# EAGLE board proiect (EAGLE 9.6.2)
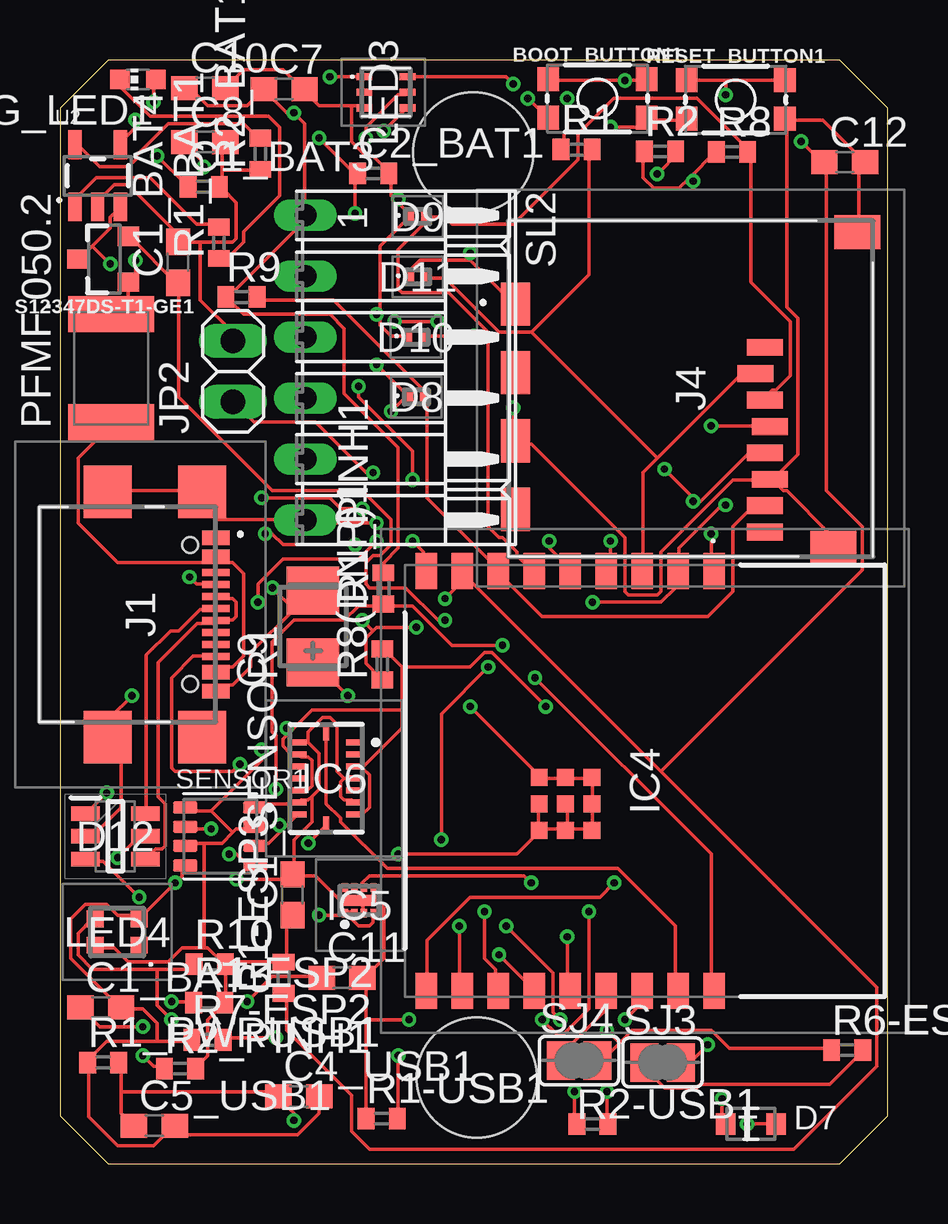
[diagram p0: board, top side]
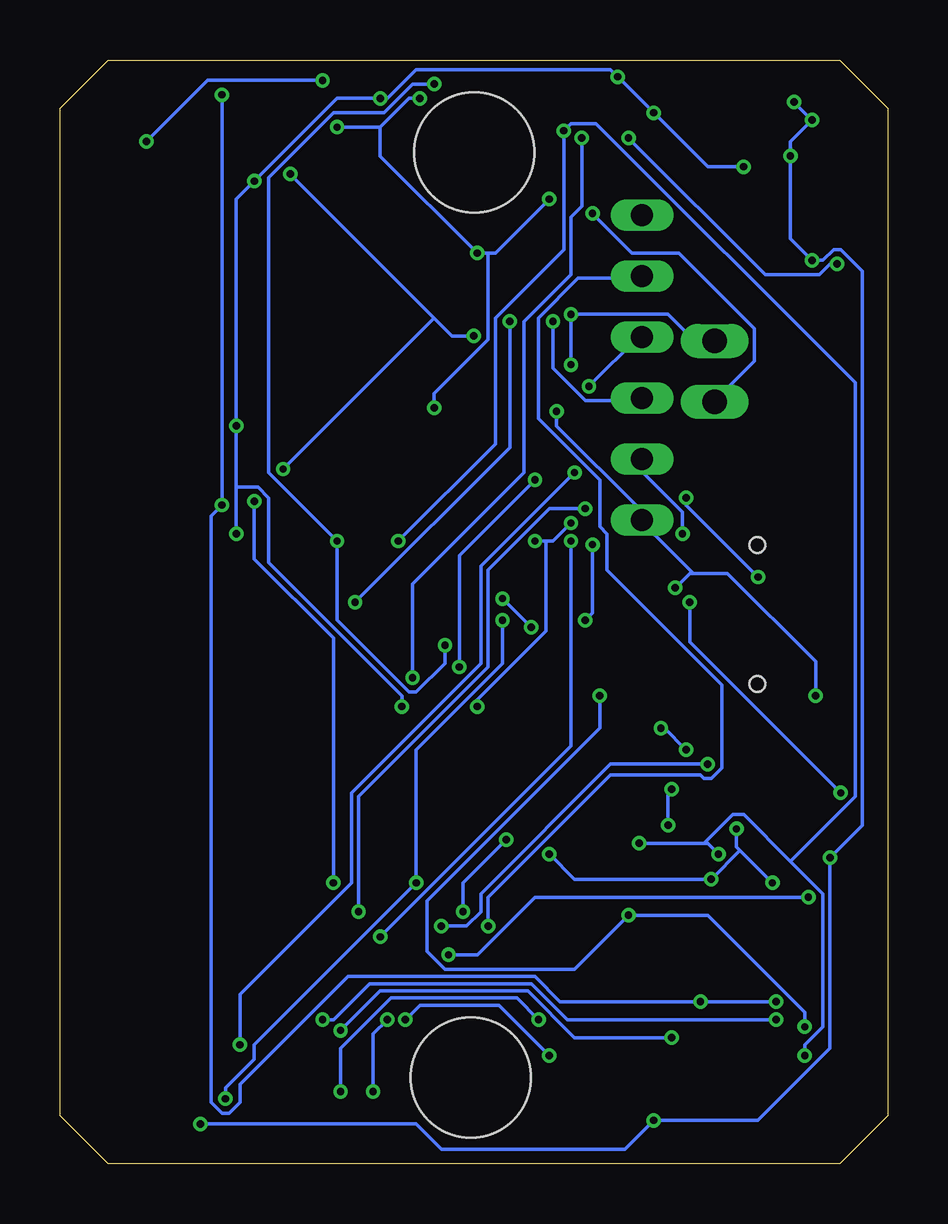
[diagram p1: board, bottom side, seen from below]

Size 34.5 x 46 mm. Coordinates in mm from the lower left corner, seen from the top.
Outline: 0,44 0,2 2,0 32.5,0 34.5,2 34.5,44 32.5,46 2,46 0,44
Copper layers (1*16): Top 0.035mm / dielectric 1.5mm / Bottom 0.035mm
Design rules "PCB-POOL Standard": minimum track width 0.15mm, minimum drill 0.3mm, track to track 0.15mm, track to pad 0.15mm, pad to pad 0.15mm, via to via 0.15mm, smd to smd 0.15mm, copper to edge 0.3mm, drill to drill 0.2mm, minimum pad ring 0.2mm, minimum via ring 0.15mm, stop-mask expansion 0.03mm, vias tented up to drill 0mil, thermal gap 0.2mm
Holes 5 mm at 17.22,42.14 17.37,3.58

## Footprints (pad centres in the part's own frame; a part is rotated, then mirrored left to right if it is on the bottom)
ESP32_WROVER_SPARKFUN-SWITCHES_TACTILE_SWITCH_SMD_4.6X2.8MM = smd 0.9 x 1: 1 -2.05,-0.8; 2 2.05,-0.8; 3 2.05,0.8; 4 -2.05,0.8
ESP32_WROVER_EAGLE-LTSPICE_C0402 = smd 0.7 x 0.9: 1 -0.65,0; 2 0.65,0
ESP32_WROVER_RCL_C0603 = smd 1.1 x 1: 1 -0.85,0; 2 0.85,0
RCL_CT3528 = smd 2 x 2.2: + -1.5,0; - 1.5,0
ESP32_WROVER_ADAFRUIT_CHIP-LED0603 = smd 0.8 x 0.8: A 0,-0.75; C 0,0.75
ESP32_WROVER_AVX---SD0805S020S1R0_AVX_SD0805S020S1R0_0 = smd 0.8 x 0.9: 1 -1.05,0; 2 1.05,0
SAMACSYS_PARTS_PESD5V0S1BL315 = smd 0.4 x 0.7: 1 -0.35,0; 2 0.35,0
SAMACSYS_PARTS_SOT95P280X145-6N = smd 1.2 x 0.6: 1 -1.25,0.95; 2 -1.25,0; 3 -1.25,-0.95; 4 1.25,-0.95; 5 1.25,0; 6 1.25,0.95
SAMACSYS_PARTS_ESP32C3WROOM02H4 = smd 1.5 x 0.9: 1 0.75,12.9; 2 0.75,11.4; 3 0.75,9.9; 4 0.75,8.4; 5 0.75,6.9; 6 0.75,5.4; 7 0.75,3.9; 8 0.75,2.4; 9 0.75,0.9; 10 18.25,0.9; 11 18.25,2.4; 12 18.25,3.9; 13 18.25,5.4; 14 18.25,6.9; 15 18.25,8.4; 16 18.25,9.9; 17 18.25,11.4; 18 18.25,12.9 | smd 0.7 x 0.7: 19 10.46,6.7; 20 11.56,6.7; 21 11.56,7.8; 22 10.46,7.8; 23 9.36,7.8; 24 9.36,6.7; 25 9.36,5.6; 26 10.46,5.6; 27 11.56,5.6
SAMACSYS_PARTS_NCP186AMX330TAG = smd 0.26 x 0.35: 1 -0.6,-0.275; 2 -0.2,-0.275; 3 0.2,-0.275; 4 0.6,-0.275; 5 0.6,0.775; 6 0.2,0.775; 7 -0.2,0.775; 8 -0.6,0.775 | smd 1.44 x 0.44: 9 0,0.25
SAMACSYS_PARTS_BMI085 = smd 0.675 x 0.25: 1 1.165,1.5; 2 1.165,1; 3 1.165,0.5; 4 1.165,0; 5 1.165,-0.5; 6 1.165,-1; 7 1.165,-1.5; 9 -1.165,-1.5; 10 -1.165,-1; 11 -1.165,-0.5; 12 -1.165,0; 13 -1.165,0.5; 14 -1.165,1; 15 -1.165,1.5 | smd 0.25 x 0.675: 8 0,-1.915; 16 0,1.915
SAMACSYS_PARTS_USB4110GFA = smd 0.3 x 1.15: A1 -3.35,3.678; A4 -2.55,3.678; A5 -1.25,3.678; A6 -0.25,3.678; A7 0.25,3.678; A8 1.25,3.678; A9 2.55,3.678; A12 3.35,3.678; B1 3.05,3.678; B4 2.25,3.678; B5 1.75,3.678; B6 0.75,3.678; B7 -0.75,3.678; B8 -1.75,3.678; B9 -2.25,3.678; B12 -3.05,3.678 | smd 2.18 x 2: MP1 -5.11,-0.827; MP2 5.11,-0.827; MP3 -5.11,3.103; MP4 5.11,3.103 | hole 0.65: -2.89,2.603; 2.89,2.603
SAMACSYS_PARTS_112ATAARR03ATTEND = smd 1.8 x 1.2: G1 10.6,10.4; G2 4.9,10.4; S1 7.75,10.4; S2 2.05,10.4 | smd 1.4 x 1.9: G3 13.6,-3.85; G4 0.45,-2.85 | smd 0.7 x 1.5: P1 8.8,0; P2 7.7,0.4; P3 6.6,0; P4 5.5,-0.2; P5 4.4,0; P6 3.3,-0.2; P7 2.2,0; P8 1.1,0
PINHEAD_1X02 = drill 1.016 long: 1 -1.27,0; 2 1.27,0
ESP32_WROVER_SAMACSYS_PARTS_LTR303ALS01 = smd 0.3 x 0.65: 1 -0.65,-0.9; 2 0,-0.9; 3 0.65,-0.9; 4 0.65,0.9; 5 0,0.9; 6 -0.65,0.9
SAMACSYS_PARTS_WS2812B2020 = smd 0.7 x 0.7: 1 0.915,-0.55; 2 0.915,0.55; 3 -0.915,0.55; 4 -0.915,-0.55
ESP32_WROVER_VARISTOR_CT/CN1812 = smd 1.5 x 3.6: 1 -2.25,0; 2 2.25,0
ESP32_WROVER_EAGLE-LTSPICE_R0402 = smd 0.7 x 0.9: 1 -0.65,0; 2 0.65,0
ESP32_WROVER_SPARKFUN-DISCRETESEMI_SOT23-3 = smd 0.8 x 0.9: 1 -0.95,-1; 2 0.95,-1; 3 0,1.1
ESP32_WROVER_BME680_PSON80P300X300X100-8N = smd 1.016 x 0.5: 1 1.458,1.2; 2 1.458,0.4; 3 1.458,-0.4; 4 1.458,-1.2; 5 -1.458,-1.22; 6 -1.458,-0.4; 7 -1.458,0.4; 8 -1.458,1.2
JUMPER_SJ = smd 1.168 x 1.6: 1 -0.762,0; 2 0.762,0
06PA = drill 0.914 long: 1 -6.35,0; 2 -3.81,0; 3 -1.27,0; 4 1.27,0; 5 3.81,0; 6 6.35,0
ESP32_WROVER_SPARKFUN-IC-POWER_SOT23-5 = smd 0.55 x 1.2: 1 -0.95,-1.3; 2 0,-1.3; 3 0.95,-1.3; 4 0.95,1.3; 5 -0.95,1.3

## Placement (x,y rotation side)
BOOT_BUTTON1  [ESP32_WROVER_SPARKFUN-SWITCHES_TACTILE_SWITCH_SMD_4.6X2.8MM]  22.4,44.4 0 top
C1_BAT3  4.7uF  [ESP32_WROVER_EAGLE-LTSPICE_C0402]  5.99,40.72 0 top
C1_BAT4  4.7uF  [ESP32_WROVER_RCL_C0603]  4.93,37.57 90 top
C1_BAT5  4.7uF  [ESP32_WROVER_RCL_C0603]  1.7,6.5 0 top
C1_SENSOR1  100nF  [ESP32_WROVER_RCL_C0603]  9.7,11.2 90 top
C2_BAT1  4.7uF  [ESP32_WROVER_EAGLE-LTSPICE_C0402]  13.06,41.27 0 top
C4_USB1  100nF  [ESP32_WROVER_RCL_C0603]  9.96,2.79 0 top
C5_USB1  4.7uF  [ESP32_WROVER_RCL_C0603]  3.94,1.57 0 top
C7  100nF  [ESP32_WROVER_RCL_C0603]  9.35,44.78 0 top
C8  100nF  [ESP32_WROVER_RCL_C0603]  6.05,42.57 0 top
C9  100uF TANT  [RCL_CT3528]  10.54,22.38 90 top
C10  100nF  [ESP32_WROVER_RCL_C0603]  6.05,44.83 0 top
C11  1uF  [ESP32_WROVER_RCL_C0603]  11.76,7.75 0 top
C12  100nF  [ESP32_WROVER_RCL_C0603]  32.72,41.73 0 top
CHG_LED1  [ESP32_WROVER_ADAFRUIT_CHIP-LED0603]  3.25,45.19 90 top
D7  ESP32_WROVER_AVX---SD0805S020S1R0_AVX_SD0805S020S1R0AVX_SD0805S020S1R0_0_0  [ESP32_WROVER_AVX---SD0805S020S1R0_AVX_SD0805S020S1R0_0]  28.8,1.65 0 top
D8  PESD3V3S1BLYL  [SAMACSYS_PARTS_PESD5V0S1BL315]  14.86,31.95 0 top
D9  PESD3V3S1BLYL  [SAMACSYS_PARTS_PESD5V0S1BL315]  14.91,39.47 0 top
D10  PESD3V3S1BLYL  [SAMACSYS_PARTS_PESD5V0S1BL315]  14.83,34.44 0 top
D11  PESD3V3S1BLYL  [SAMACSYS_PARTS_PESD5V0S1BL315]  14.91,36.96 0 top
D12  USBLC6-2SC6Y  [SAMACSYS_PARTS_SOT95P280X145-6N]  2.31,13.64 0 top
IC4  ESP32-C3-WROOM-02-H4  [SAMACSYS_PARTS_ESP32C3WROOM02H4]  14.38,25.45 270 top
IC5  NCP186BMX330TAG  [SAMACSYS_PARTS_NCP186AMX330TAG]  12.47,10.72 0 top
IC6  BMI085  [SAMACSYS_PARTS_BMI085]  11.1,16.05 0 top
J1  USB4110-GF-A  [SAMACSYS_PARTS_USB4110GFA]  2.82,22.89 270 top
J4  112A-TAAR-R03_ATTEND  [SAMACSYS_PARTS_112ATAARR03ATTEND]  29.39,25.22 90 top
JP2  [PINHEAD_1X02]  7.21,33.02 90 top
LED3  LTR308  [ESP32_WROVER_SAMACSYS_PARTS_LTR303ALS01]  13.59,44.65 270 top
LED4  WS2812B-2020  [SAMACSYS_PARTS_WS2812B2020]  2.39,9.65 0 top
PFMF.050.2  500mA  [ESP32_WROVER_VARISTOR_CT/CN1812]  2.13,33.15 90 top
R1  10K  [ESP32_WROVER_EAGLE-LTSPICE_R0402]  21.54,42.27 0 top
R1-ESP2  10K  [ESP32_WROVER_EAGLE-LTSPICE_R0402]  6.22,6.71 0 top
R1-ESP3  10K  [ESP32_WROVER_EAGLE-LTSPICE_R0402]  9.32,7.75 90 top
R1-USB1  5K1  [ESP32_WROVER_EAGLE-LTSPICE_R0402]  13.41,1.88 0 top
R1_BAT1  200  [ESP32_WROVER_EAGLE-LTSPICE_R0402]  6.63,38.38 90 top
R1_PINH1  10k  [ESP32_WROVER_EAGLE-LTSPICE_R0402]  13.49,23.98 90 top
R1_PWRUSB1  100K  [ESP32_WROVER_EAGLE-LTSPICE_R0402]  1.8,4.22 0 top
R2  10K  [ESP32_WROVER_EAGLE-LTSPICE_R0402]  25.02,42.19 0 top
R2-USB1  5K1  [ESP32_WROVER_EAGLE-LTSPICE_R0402]  22.2,1.65 0 top
R2_BAT1  2K  [ESP32_WROVER_EAGLE-LTSPICE_R0402]  8.36,42.09 90 top
R2_PINH1  10K  [ESP32_WROVER_EAGLE-LTSPICE_R0402]  5,3.96 0 top
R6-ESP2  100K  [ESP32_WROVER_EAGLE-LTSPICE_R0402]  32.82,4.72 0 top
R7-ESP2  100K  [ESP32_WROVER_EAGLE-LTSPICE_R0402]  6.15,5.16 0 top
R8  10K  [ESP32_WROVER_EAGLE-LTSPICE_R0402]  28.02,42.16 0 top
R8(DNP)1  10K  [ESP32_WROVER_EAGLE-LTSPICE_R0402]  13.44,20.8 90 top
R9  10K  [ESP32_WROVER_EAGLE-LTSPICE_R0402]  7.57,36.12 0 top
R10  10K  [ESP32_WROVER_EAGLE-LTSPICE_R0402]  6.25,8.31 0 top
RESET_BUTTON1  [ESP32_WROVER_SPARKFUN-SWITCHES_TACTILE_SWITCH_SMD_4.6X2.8MM]  28.17,44.35 0 top
S12347DS-T1-GE1  20V/4.2A/52mΩ/1.4W  [ESP32_WROVER_SPARKFUN-DISCRETESEMI_SOT23-3]  1.85,37.69 90 top
SENSOR1  BME680  [ESP32_WROVER_BME680_PSON80P300X300X100-8N]  6.68,13.64 0 top
SJ3  [JUMPER_SJ]  25.12,4.22 0 top
SJ4  [JUMPER_SJ]  21.64,4.29 0 top
SL2  [06PA]  10.24,33.17 270 top
U2  MCP73831  [ESP32_WROVER_SPARKFUN-IC-POWER_SOT23-5]  1.57,41.17 0 top

## Library data of the parts
BOOT_BUTTON1 RESET_BUTTON1 = ESP32_C3_Sparrow; PROD_ID: SWCH-14139; SF_SKU: COM-08720
C1_BAT3 C2_BAT1 = ESP32_C3_Sparrow; SPICEMODEL: NONE; SPICEPREFIX: C
C1_BAT4 C1_BAT5 C1_SENSOR1 C4_USB1 C5_USB1 C7-C12 = ESP32_C3_Sparrow; SPICEPREFIX: C
CHG_LED1 JP2 PFMF.050.2 SJ3 SJ4 = ESP32_C3_Sparrow
D7 = ESP32_C3_Sparrow; CENTROID_NOT_SPECIFIED: No; DATASHEET: http://datasheets.avx.com/schottky.pdf; DIGIKEY_DESCRIPTION: DIODE SCHOTTKY 20V 1A 0805; DIGIKEY_PART_NUMBER: 478-7800-1-ND; LEAD_FREE: yes; MF: AVX; MOUSER_PART_NUMBER: 581-SD0805S020S1R0; MPN: SD0805S020S1R0; PACKAGE: 0805 (2012 metric); PREFIX: D; ROHS: yes; TEMPERATURE_RANGE_HIGH: +125°C; TEMPERATURE_RANGE_LOW: -55°C
D8-D11 = ESP32_C3_Sparrow; ARROW_PART_NUMBER: PESD3V3S1BLYL; ARROW_PRICE-STOCK: https://www.arrow.com/en/products/pesd3v3s1blyl/nexperia?region=nac; DESCRIPTION: PESD3V3S1BL - Low capacitance bidirectional ESD protection diode; HEIGHT: 0mm; MANUFACTURER_NAME: Nexperia; MANUFACTURER_PART_NUMBER: PESD3V3S1BLYL; MOUSER_PART_NUMBER: 771-PESD3V3S1BLYL; MOUSER_PRICE-STOCK: https://www.mouser.co.uk/ProductDetail/Nexperia/PESD3V3S1BLYL?qs=vLWxofP3U2zWoKHYJMVoKQ%3D%3D
D12 = ESP32_C3_Sparrow; ARROW_PART_NUMBER: USBLC6-2SC6Y; ARROW_PRICE-STOCK: https://www.arrow.com/en/products/usblc6-2sc6y/stmicroelectronics?region=nac; DESCRIPTION: Low Cap. ESD Protection Auto SOT-23-6 STMicroelectronics USBLC6-2SC6Y, Dual Uni-Directional TVS Diode Array, 6-Pin SOT-23; HEIGHT: 1.45mm; MANUFACTURER_NAME: STMicroelectronics; MANUFACTURER_PART_NUMBER: USBLC6-2SC6Y; MOUSER_PART_NUMBER: 511-USBLC6-2SC6Y; MOUSER_PRICE-STOCK: https://www.mouser.co.uk/ProductDetail/STMicroelectronics/USBLC6-2SC6Y?qs=gNDSiZmRJS%2FOgDexvXkdow%3D%3D
IC4 = ESP32_C3_Sparrow; DESCRIPTION: WiFi Modules (802.11) SMD module, ESP32-C3, 4MB SPI flash, PCB antenna, -40 C +105 C; HEIGHT: 3.35mm; MANUFACTURER_NAME: Espressif Systems; MANUFACTURER_PART_NUMBER: ESP32-C3-WROOM-02-H4; MOUSER_PART_NUMBER: 356-ESP32C3WROOM02H4; MOUSER_PRICE-STOCK: https://www.mouser.co.uk/ProductDetail/Espressif-Systems/ESP32-C3-WROOM-02-H4?qs=stqOd1AaK79%2FSA14oWtR%252Bw%3D%3D
IC5 = ESP32_C3_Sparrow; ARROW_PART_NUMBER: NCP186BMX330TAG; ARROW_PRICE-STOCK: https://www.arrow.com/en/products/ncp186bmx330tag/on-semiconductor?region=nac; DESCRIPTION: LDO Voltage Regulators FAST TRANSIENT RESPO; HEIGHT: mm; MANUFACTURER_NAME: onsemi; MANUFACTURER_PART_NUMBER: NCP186BMX330TAG; MOUSER_PART_NUMBER: 863-NCP186BMX330TAG; MOUSER_PRICE-STOCK: https://www.mouser.co.uk/ProductDetail/onsemi/NCP186BMX330TAG?qs=tCMd4XlZ%2FiDuLBXmI4EY0w%3D%3D
IC6 = ESP32_C3_Sparrow; ARROW_PART_NUMBER: BMI085; ARROW_PRICE-STOCK: https://www.arrow.com/en/products/bmi085/bosch; DESCRIPTION: IMUs - Inertial Measurement Units High-performance IMU BMI085 for virtual and augmented reality applications; HEIGHT: 1mm; MANUFACTURER_NAME: BOSCH; MANUFACTURER_PART_NUMBER: BMI085; MOUSER_PART_NUMBER: 262-BMI085; MOUSER_PRICE-STOCK: https://www.mouser.co.uk/ProductDetail/Bosch-Sensortec/BMI085?qs=y6ZabgHbY%252ByGCM8LfWZyqA%3D%3D
J1 = ESP32_C3_Sparrow; DESCRIPTION: CONN USB 2.0 TYPE-C R/A SMT; HEIGHT: 3.26mm; MANUFACTURER_NAME: GCT (GLOBAL CONNECTOR TECHNOLOGY); MANUFACTURER_PART_NUMBER: USB4110-GF-A; MOUSER_PART_NUMBER: 640-USB4110-GF-A; MOUSER_PRICE-STOCK: https://www.mouser.co.uk/ProductDetail/GCT/USB4110-GF-A?qs=KUoIvG%2F9IlYiZvIXQjyJeA%3D%3D
J4 = ESP32_C3_Sparrow; DESCRIPTION: Micro SD Card Socket, Push-Push Type, Top Mount, SMT, H=1.83mm, 10u; HEIGHT: 1.9mm; MANUFACTURER_NAME: ATTEND; MANUFACTURER_PART_NUMBER: 112A-TAAR-R03 ATTEND
LED3 = ESP32_C3_Sparrow; ARROW_PART_NUMBER: LTR-303ALS-01; ARROW_PRICE-STOCK: https://www.arrow.com/en/products/ltr-303als-01/lite-on-technology?region=nac; DESCRIPTION: Ambient Light Sensors Ambient Light Photo Sensor; HEIGHT: 0mm; MANUFACTURER_NAME: Lite-On; MANUFACTURER_PART_NUMBER: LTR-303ALS-01; MOUSER_PART_NUMBER: 859-LTR-303ALS-01; MOUSER_PRICE-STOCK: https://www.mouser.co.uk/ProductDetail/Lite-On/LTR-303ALS-01?qs=Ml%2FaxAEbwm%252Bm%252BetMkBDC8g%3D%3D
LED4 = ESP32_C3_Sparrow; DESCRIPTION: LED; SMD; 2020; RGB; 2x2x0.84mm; 3.75.3V; Lens: transparent; 2kHz; HEIGHT: 0.84mm; MANUFACTURER_NAME: Worldsemi; MANUFACTURER_PART_NUMBER: WS2812B-2020
R1 R1-ESP2 R1-ESP3 R1-USB1 R1_BAT1 R1_PINH1 R1_PWRUSB1 R2 R2-USB1 R2_BAT1 R2_PINH1 R6-ESP2 R7-ESP2 R8 R8(DNP)1 R9 R10 = ESP32_C3_Sparrow; SPICEMODEL: NONE; SPICEPREFIX: R
S12347DS-T1-GE1 = ESP32_C3_Sparrow; PROD_ID: TRAN-14388
SENSOR1 = ESP32_C3_Sparrow; AVAILABILITY: Unavailable; DESCRIPTION: Integrated Environmental Unit; MF: Bosch Sensortec; MP: BME680; PACKAGE: LGA-8 Bosch Tools; PRICE: None
SL2 = con-amp-quick; OC_FARNELL: unknown; OC_NEWARK: unknown
U2 = ESP32_C3_Sparrow; PROD_ID: IC-09995

## Nets
3V1: C1_SENSOR1.1 C7.1 C8.1 C10.1 IC4.1 IC6.3 IC6.7 IC6.11 IC6.14 J4.P4 LED3.1 LED4.4 R1-ESP2.2 R1-ESP3.2 R1.1 R1_PINH1.2 R2.1 R2_PINH1.2 R8(DNP)1.2 R8.1 R9.1 R10.2 SENSOR1.2 SENSOR1.6 SENSOR1.8 SL2.1
A2: IC4.15 SJ4.1
BOOT1: BOOT_BUTTON1.3 BOOT_BUTTON1.4 C12.1 IC4.8 R1-ESP3.1 R8(DNP)1.1 SL2.5
D+1: D12.1 IC4.14
D-1: D12.3 IC4.13
DN1: D12.4 J1.A7 J1.B7
DP1: D12.6 J1.A6 J1.B6
GND1: BOOT_BUTTON1.1 BOOT_BUTTON1.2 C1_BAT3.2 C1_BAT4.2 C1_BAT5.2 C1_SENSOR1.2 C2_BAT1.2 C4_USB1.2 C5_USB1.2 C7.2 C8.2 C9.- C10.2 C11.2 C12.2 D8.1 D9.1 D10.1 D11.1 D12.2 IC4.9 IC4.19 IC4.20 IC4.21 IC4.22 IC4.23 IC4.24 IC4.25 IC4.26 IC4.27 IC5.3 IC5.5 IC5.9 IC6.4 IC6.6 IC6.10 IC6.15 J1.A1 J1.A12 J1.B1 J1.B12 J1.MP1 J1.MP2 J1.MP3 J1.MP4 J4.G1 J4.G2 J4.G3 J4.G4 J4.P6 JP2.2 LED3.3 LED4.2 R1-USB1.1 R1_PWRUSB1.1 R2-USB1.2 R2_BAT1.1 R7-ESP2.1 RESET_BUTTON1.1 RESET_BUTTON1.2 SENSOR1.1 SENSOR1.5 SENSOR1.7 SL2.6 U2.2
GPIO2: IC4.18 LED3.5
GPIO3: IC4.17 IC6.16
MISO1: D8.2 IC4.7 J4.P7 R9.2
MOSI1: D9.2 IC4.6 J4.P3 R8.2
N$9: J1.A5 R1-USB1.2
N$11: J1.B5 R2-USB1.1
N$12: C1_BAT4.1 D7.1 IC5.6 IC5.7 IC5.8 S12347DS-T1-GE1.2
N$13: C1_BAT5.1 C9.+ IC5.1 IC5.2 IC5.4
N$14: R6-ESP2.2 SJ3.1
N$15: R6-ESP2.1 R7-ESP2.2 SJ4.2
N$16: R1_BAT1.2 U2.1
N$17: CHG_LED1.C R1_BAT1.1
N$18: R2_BAT1.2 U2.5
NEOPIXEL1: IC4.16 LED4.3 R10.1
RESET1: C11.1 IC4.2 R1-ESP2.1 RESET_BUTTON1.3 RESET_BUTTON1.4 SL2.4
RX1: IC4.11 SL2.2
SCK1: D10.2 IC4.10 J4.P5 R2.2
SCL1: IC4.5 IC6.8 LED3.4 R2_PINH1.1 SENSOR1.4
SDA1: IC4.4 IC6.9 LED3.6 R1_PINH1.1 SENSOR1.3
SS1: D11.2 IC4.3 J4.P2 R1.2
TX1: IC4.12 SL2.3
VBAT1: C2_BAT1.1 JP2.1 S12347DS-T1-GE1.3 SJ3.2 U2.3
VBUS1: C1_BAT3.1 C4_USB1.1 C5_USB1.1 CHG_LED1.A D7.2 D12.5 PFMF.050.2.2 R1_PWRUSB1.2 S12347DS-T1-GE1.1 U2.4
VUSB1: J1.A4 J1.A9 J1.B4 J1.B9 PFMF.050.2.1

## Tracks (layer width: path | path; a pad name or v marks a point on that pad's centre or on a via)
3V1  (via drill 0.3)
  Top 0.15: R1_PINH1.2 13.5,24.75 13.5,25.05 14.1,25.65 14.1,29.85 11.85,32.1 11.85,34.8 11.25,35.4 7.65,35.4 7.05,36 R9.1 7.05,36.15 10.35,39.45 SL2.1 10.2,39.6 10.2,43.35 v9.75,43.8 9.45,43.8 8.55,44.7 C7.1 8.4,44.7 7.8,44.1 6.15,44.1 5.55,44.7 5.25,44.7 C10.1 | 6,13.35 6.75,13.35 7.2,13.8 | 6,13.35 5.25,13.35 SENSOR1.6 | 7.2,13.8 7.35,13.95 8.1,13.95 SENSOR1.2 | 6.3,14.7 5.25,14.7 SENSOR1.8 | 7.2,13.8 6.3,14.7 | R2_PINH1.2 5.7,4.05 6.15,4.5 6.15,6 6.75,6.6 R1-ESP2.2 6.9,6.75 6.9,8.25 R10.2 | C1_SENSOR1.1 9.6,10.35 9.45,10.2 9.45,8.4 R1-ESP3.2 9.3,8.4 6.9,8.4 R10.2 | 6,9 6.15,9 6.75,8.4 R10.2 | 6,9 5.1,9 4.5,8.4 2.85,8.4 2.25,9 1.5,9 LED4.4 | 6,9 6,13.35 | IC6.11 10.05,15.6 10.35,15.6 10.5,15.75 10.5,16.8 10.35,16.95 10.05,16.95 IC6.14 9.9,17.1 9.6,17.1 9.3,17.4 9.3,17.7 9.6,18 | 12.6,16.5 12.9,16.2 12.9,14.85 12.6,14.55 12.3,14.55 IC6.7 | 12.6,16.5 12.3,16.5 IC6.3 12.6,16.5 | 14.25,20.7 13.5,21.45 R8(DNP)1.2 | 14.25,18.9 14.25,18.15 12.6,16.5 | 14.25,18.9 14.25,20.7 | 9.6,18 10.5,18.9 14.25,18.9 | 26.25,41.1 27.3,42.15 R8.1 | 26.25,41.1 25.8,40.65 24.75,40.65 24.3,41.1 24.3,42.15 R2.1 | v11.25,45.3 12.6,45.3 LED3.1 | v21.15,44.4 21.15,43.05 21,42.9 21,42.3 R1.1 | v6,41.55 6,41.7 5.25,42.45 C8.1 | v27.15,26.25 27.15,24.75 IC4.1 | v27.15,30.75 29.55,30.75 J4.P4 | v26.4,40.95 26.25,41.1 | 14.25,20.7 17.1,20.7 17.7,21.3 18,21.3 v20.25,19.05 | 6.3,14.7 8.4,16.8 v8.4,17.25 | 9.6,18 v9.45,18.15
  Bottom 0.15: v6,41.55 7.5,41.55 v9.75,43.8 v11.25,45.3 11.55,45.6 19.65,45.6 20.85,44.4 v21.15,44.4 22.95,44.4 v26.4,40.95 27.15,40.2 v27.15,30.75 27.15,28.2 | 27.15,28.2 v27.15,26.25 | v20.25,19.05 20.25,19.5 25.8,25.05 25.8,27.75 26.25,28.2 27.15,28.2 | v8.4,17.25 9.3,18.15 v9.45,18.15
A2
  Top 0.15: IC4.15 22.65,7.2 22.65,6.3 21,4.65 21,4.35 SJ4.1
BOOT1  (via drill 0.3)
  Top 0.15: BOOT_BUTTON1.4 20.4,45.15 v23.55,45.15 24.45,45.15 BOOT_BUTTON1.3 | 16.95,24.45 16.8,24.6 IC4.8 16.95,24.45 | 16.95,24.45 25.05,16.35 | 25.05,16.35 34.05,7.35 34.05,4.05 30.6,0.6 12.9,0.6 12.15,1.35 12.15,2.85 9.45,5.55 9.45,7.05 R1-ESP3.1 | 13.05,22.2 13.2,22.35 v14.85,22.35 | 13.05,22.2 12.75,21.9 12.75,20.85 13.35,20.25 R8(DNP)1.1 | 16.95,24.45 v16.05,23.55 | 25.05,16.35 33.45,24.75 33.45,26.55 31.95,28.05 31.95,41.7 C12.1 31.8,41.7 v30.9,42.6 | v8.55,26.25 8.85,26.25 9.3,25.8 v12.3,25.8 | 13.05,22.2 v12.6,22.65
  Bottom 0.15: v16.05,23.55 v14.85,22.35 | v23.55,45.15 28.35,45.15 v30.9,42.6 | v8.55,26.25 8.55,27.15 10.2,28.8 10.2,29.25 SL2.5 | v12.3,25.8 12.3,22.95 v12.6,22.65
D+1  (via drill 0.3)
  Top 0.15: v1.95,15.45 1.2,14.7 D12.1 | v8.25,23.4 8.25,24.15 9.3,25.2 12.45,25.2 v13.2,25.95 | v21.15,9.45 21.15,7.35 IC4.14
  Bottom 0.15: v1.95,15.45 8.25,21.75 v8.25,23.4 | v13.2,25.95 13.2,17.4 v21.15,9.45
D-1  (via drill 0.3)
  Top 0.15: v3.3,11.1 1.8,12.6 1.2,12.6 D12.3 | v18.3,8.7 19.65,7.35 IC4.13
  Bottom 0.15: v3.3,11.1 14.7,11.1 17.1,8.7 v18.3,8.7
DN1
  Top 0.15: J1.A7 6.6,22.65 7.2,22.65 7.35,22.8 7.35,23.4 7.2,23.55 6.6,23.55 J1.B7
  Top 0.152: D12.4 3.98,13.11 4.25,13.11 4.39,13.25 4.39,14.98 4.09,15.28 4.09,20.89 5.71,22.51 6.37,22.51 J1.A7
DP1
  Top 0.15: 6.99,22.12 6.51,22.12 J1.B6 | J1.A6 6.45,23.1 5.85,23.1 4.95,22.2 4.61,22.2 3.6,21.2 3.6,14.7 D12.6
GND1  (via drill 0.3)
  Top 0.15: SENSOR1.5 5.1,12.3 5.1,12 v4.8,11.7 3.45,10.35 LED4.2 3.3,10.35 2.4,10.35 1.95,10.8 1.05,10.8 0.45,10.2 0.45,8.55 2.55,6.45 C1_BAT5.2 2.7,6.45 3.45,6.45 4.05,5.85 4.05,5.1 | v6.3,13.95 5.25,13.95 SENSOR1.7 | 4.05,5.1 5.4,5.1 R7-ESP2.1 | 4.05,5.1 1.95,5.1 1.2,4.35 R1_PWRUSB1.1 1.2,4.2 1.2,1.95 2.4,0.75 3.9,0.75 4.65,1.5 C5_USB1.2 4.8,1.5 5.1,1.2 9.9,1.2 10.8,2.1 10.8,2.7 C4_USB1.2 | 13.05,11.1 13.05,11.4 IC5.5 | 13.05,11.1 12.9,10.95 12.6,10.95 IC5.9 | C1_SENSOR1.2 9.75,12 10.65,12 11.7,10.95 12.45,10.95 IC5.9 | 11.85,16.05 11.7,15.9 11.7,15.3 11.85,15.15 12.15,15.15 IC6.6 | 11.85,16.05 12.15,16.05 IC6.4 | SENSOR1.1 8.25,14.85 8.4,15 9.9,15 IC6.10 10.05,15.15 10.35,15.15 10.5,15.3 | 10.35,17.55 10.05,17.55 IC6.15 | 10.35,17.55 10.8,17.1 10.8,15.6 10.5,15.3 | 11.85,16.05 11.55,16.35 11.55,18.3 11.25,18.6 10.95,18.6 10.35,18 10.35,17.55 | 10.5,15.3 10.5,14.25 9.75,13.5 9.75,12.15 C1_SENSOR1.2 | 12.75,6 12.75,7.65 C11.2 12.75,7.8 13.5,8.55 13.5,10.65 13.05,11.1 | 12.75,6 12.75,1.95 R1-USB1.1 | v22.8,3 22.8,1.8 R2-USB1.2 | 12.75,6 v14.55,6 | 13.05,11.1 12.55,10.99 IC5.9 | v7.35,11.85 9.45,11.85 9.6,12 C1_SENSOR1.2 | J1.MP4 6,17.85 6.45,18.3 6.45,19.5 J1.A12 6.6,19.65 6.6,19.8 J1.B1 6.6,19.95 7.2,19.95 7.95,20.7 7.95,21.3 9.75,23.1 | 9.75,23.1 10.5,23.85 C9.- 9.75,23.1 | J1.B12 6.6,25.95 6.6,26.1 J1.A1 6.45,26.25 6.45,26.85 | 6.45,26.85 6.45,27.45 6,27.9 J1.MP3 5.85,28.05 2.1,28.05 J1.MP1 | D12.2 1.2,13.65 1.5,13.95 1.65,13.95 2.55,14.85 2.55,17.25 2.1,17.7 J1.MP2 2.1,17.85 2.1,18.6 v3,19.5 | IC4.27 19.95,13.95 19.95,14.85 IC4.26 | 21.15,13.95 21.15,14.85 IC4.19
  Top 0.15: IC4.27 20.1,13.95 21,13.95 IC4.20 21.15,13.95 | 21.15,13.95 22.05,13.95 IC4.21 22.2,13.95 22.2,14.85 IC4.22 22.2,15 22.2,16.05 IC4.23 22.05,16.05 21.15,16.05 IC4.24 21,16.05 20.1,16.05 IC4.25 19.95,16.2 v17.1,19.05 | v13.8,31.35 14.4,31.95 D8.1 14.4,32.1 v13.2,33.3 | v14.7,25.95 15.15,25.5 15.15,24.75 IC4.9 | v13.2,26.7 10.35,26.7 SL2.6 10.2,26.85 6.45,26.85 | v8.85,24 9.75,23.1 | v14.1,12.9 19.05,12.9 19.95,13.8 IC4.27 | 30.3,43.5 31.8,43.5 33.45,41.85 C12.2 33.45,41.7 33.3,41.55 33.3,38.85 J4.G3 | 29.7,28.5 30.15,28.05 30.3,28.05 32.1,26.25 32.1,25.8 J4.G4 | 30.3,43.5 30.3,35.7 30.75,35.25 30.75,29.55 29.7,28.5 | 30.3,43.5 RESET_BUTTON1.2 | 29.7,28.5 J4.P6 29.55,28.5 28.05,28.5 25.05,25.5 25.05,23.85 24.9,23.7 23.7,23.7 23.55,23.85 23.55,26.1 19.65,30 19.05,30 J4.G2 18.9,30.15 v18.9,31.5 | 17.1,37.65 15,37.65 14.7,37.35 14.7,37.05 D11.1 | 17.1,37.65 18.9,35.85 J4.G1 | v19.5,44.4 20.25,43.65 BOOT_BUTTON1.1 | v22.95,43.2 24.15,43.2 24.45,43.5 BOOT_BUTTON1.2 24.6,43.5 26.1,43.5 RESET_BUTTON1.1 | v17.1,37.95 17.1,37.65 | 6.75,41.4 6.75,42.45 C8.2 | 6.75,41.4 6.75,40.8 C1_BAT3.2 6.75,40.65 7.35,40.05 7.35,38.55 7.2,38.4 5.85,38.4 | 6.75,41.4 8.25,41.4 R2_BAT1.1 | 5.85,38.4 4.95,38.4 C1_BAT4.2 4.8,38.55 4.8,38.85 2.85,40.8 2.25,40.8 1.65,40.2 1.65,39.9 U2.2 | 5.85,38.4 5.85,36 7.2,34.65 7.2,34.35 JP2.2 | 12.15,44.1 10.8,44.1 10.2,44.7 C7.2 10.05,44.85 9.3,45.6 7.65,45.6 6.9,44.85 C10.2 | 12.15,44.1 12.6,44.1 LED3.3 | 13.35,35.4 13.35,38.25 14.55,39.45 D9.1 14.55,39.6 13.95,40.2 | 13.35,35.4 13.35,34.95 13.8,34.5 14.4,34.5 D10.1 | 13.95,40.2 13.8,40.35 13.8,41.25 C2_BAT1.2 13.65,41.4 13.05,42 12.75,42 12.15,42.6 12.15,44.1
  Top 0.15: 13.35,35.4 v13.2,35.4 | 13.95,40.2 v14.1,40.2
  Top 0.152: IC5.3 12.63,10.49 12.63,10.71 12.55,10.79 12.55,10.99
  Bottom 0.15: v6.3,13.95 6.3,13.2 6.15,13.05 | v4.8,11.7 6.15,13.05 | v22.8,3 22.8,4.8 20.7,6.9 15.45,6.9 v14.55,6 | 6.15,13.05 v7.35,11.85 13.05,11.85 v14.1,12.9 | v13.8,31.35 13.8,30.75 10.35,27.3 10.35,26.85 SL2.6 10.2,26.7 8.1,24.6 | 14.25,25.95 13.95,25.95 v13.2,26.7 | 14.25,25.95 v14.7,25.95 | v17.1,19.05 17.1,19.35 14.25,22.2 14.25,25.95 | v3,19.5 3,20.92 6.68,24.6 8.1,24.6 | v8.85,24 8.25,24.6 8.1,24.6 | v19.5,44.4 19.95,44.4 21.15,43.2 | v22.95,43.2 21.15,43.2 | 21.15,43.2 21.15,42 v17.1,37.95 16.65,37.95 | JP2.2 7.35,34.35 8.1,34.35 9.15,35.4 v13.2,35.4 v13.2,33.3 | 16.65,37.95 16.35,37.95 v14.1,40.2 | v18.9,31.5 18.9,32.1 16.65,34.35 16.65,37.95
GPIO2  (via drill 0.3)
  Top 0.15: v12.75,42.75 12.75,43.2 14.1,44.55 14.4,44.55 LED3.5 | v19.8,20.25 27.15,12.9 27.15,7.35 IC4.18
  Bottom 0.15: v12.75,42.75 12.75,39.9 13.2,39.45 13.2,37.05 15.15,35.1 15.15,28.8 19.8,24.15 v19.8,20.25
GPIO3
  Top 0.15: IC6.16 11.1,17.85 11.1,15 11.7,14.4 11.7,14.25 13.65,12.3 23.25,12.3 25.65,9.9 25.65,7.35 IC4.17
MISO1
  Top 0.15: R9.2 8.25,36 11.4,36 15.3,32.1 D8.2 15.3,31.95 15.3,27.75 18.3,24.75 IC4.7 18.3,24.6 20.1,22.8 27,22.8 28.05,23.85 28.05,26.55 28.8,27.3 29.25,27.3 J4.P7
MOSI1
  Top 0.15: 15.45,39.45 16.05,39.45 16.35,39.15 18.9,39.15 21.6,41.85 21.6,42.9 23.1,44.4 26.55,44.4 28.65,42.3 R8.2 28.8,42.15 28.8,36.75 30.45,35.1 30.45,32.85 29.85,32.25 29.7,32.25 29.4,31.95 J4.P3 | 15.45,39.45 15.3,39.45 D9.2 15.45,39.45 | 15.45,39.45 14.1,38.1 14.1,36.45 14.25,36.3 16.2,36.3 17.85,34.65 17.85,26.55 18.3,26.1 18.45,26.1 19.05,25.5 19.05,25.35 19.65,24.75 IC4.6
N$9  (via drill 0.3)
  Top 0.15: v14.1,4.5 14.1,1.95 R1-USB1.2 | v20.1,6 20.7,5.4 21,5.4 22.05,6.45 v22.05,10.5 | v12.6,27.3 11.7,27.3 11.25,27.75 v8.4,27.75 | v5.4,24.45 5.7,24.15 6.45,24.15 J1.A5
  Bottom 0.15: v14.1,4.5 16.2,6.6 19.5,6.6 v20.1,6 | v22.05,10.5 22.05,15.3 16.65,20.7 16.65,24.75 14.1,27.3 v12.6,27.3 | v8.4,27.75 8.4,27.45 v5.4,24.45
N$11  (via drill 0.3)
  Top 0.15: v21.45,3 21.45,1.8 R2-USB1.1 | v20.85,6 20.55,6.3 20.55,7.95 v18.6,9.9 | v7.5,16.65 7.2,16.35 4.8,16.35 4.65,16.5 4.65,20.25 5.55,21.15 6.45,21.15 J1.B5
  Bottom 0.15: v21.45,3 21.45,5.4 v20.85,6 | v18.6,9.9 17.55,9.9 16.95,10.5 16.95,11.25 11.55,16.65 v7.5,16.65
N$12  (via drill 0.3)
  Top 0.15: S12347DS-T1-GE1.2 3,38.55 4.8,36.75 C1_BAT4.1 4.95,36.6 4.95,31.95 8.85,28.05 12.6,28.05 13.8,26.85 13.8,25.8 13.35,25.35 13.05,25.35 12.75,25.05 12.75,24.15 12.9,24 14.4,24 15.75,22.65 v16.05,22.65 | IC5.8 12,11.55 12.15,11.55 IC5.7 12.3,11.55 12.6,11.55 | 12.6,11.55 12.6,11.7 12.9,12 19.35,12 v19.65,11.7 | v27.6,2.7 27.6,1.95 27.75,1.8 D7.1 | 12.6,11.55 IC5.6
  Bottom 0.15: v27.6,2.7 27.6,3.15 26.4,4.35 26.4,4.95 v19.65,11.7 19.65,17.25 16.05,20.85 v16.05,22.65
N$13  (via drill 0.3)
  Top 0.15: IC5.1 12,10.5 12.15,10.5 IC5.2 | IC5.4 13.05,10.35 13.05,10.05 12.9,9.9 12.45,9.9 12,10.35 IC5.1 | v10.8,10.35 11.85,10.35 IC5.1 | v3.45,5.7 1.65,5.7 0.9,6.45 C1_BAT5.1 | v12,19.5 10.65,20.85 C9.+
  Bottom 0.15: v3.45,5.7 3.45,6.3 7.5,10.35 v10.8,10.35 13.05,8.1 18.45,8.1 19.2,8.85 19.2,10.95 12,18.15 v12,19.5
N$14
  Top 0.15: R6-ESP2.2 33.45,4.65 32.1,3.3 26.7,3.3 26.55,3.15 25.2,3.15 24.45,3.9 24.45,4.2 SJ3.1
N$15  (via drill 0.3)
  Top 0.15: 23.4,5.1 22.5,4.2 SJ4.2 | 23.4,5.1 23.85,5.55 27.15,5.55 27.9,4.8 32.1,4.8 R6-ESP2.1 | v9,5.25 6.9,5.25 R7-ESP2.2 | v22.8,5.55 23.25,5.1 23.4,5.1
  Bottom 0.15: v9,5.25 13.05,5.25 15,7.2 21.15,7.2 v22.8,5.55
N$16
  Top 0.15: R1_BAT1.2 6.6,39.15 5.7,39.15 3.75,41.1 1.5,41.1 0.75,40.35 0.75,39.9 U2.1
N$17
  Top 0.15: CHG_LED1.C 2.55,45.15 2.55,44.85 3.75,43.65 8.7,43.65 9.15,43.2 9.15,40.35 7.65,38.85 7.65,38.4 7.05,37.8 6.75,37.8 R1_BAT1.1
N$18
  Top 0.15: R2_BAT1.2 8.25,42.75 7.65,43.35 4.5,43.35 3.15,42 3.15,41.85 2.85,41.55 1.65,41.55 0.75,42.45 U2.5
NEOPIXEL1  (via drill 0.3)
  Top 0.15: 4.05,8.1 5.4,8.1 5.55,8.25 R10.1 | 4.05,8.1 1.35,8.1 0.75,8.7 0.75,9.6 1.35,10.2 LED4.3 | v23.55,6 24.15,6.6 24.15,7.2 IC4.16 | v4.65,6 4.05,6.6 4.05,8.1
  Bottom 0.15: v23.55,6 23.1,6 21.6,7.5 14.85,7.5 13.35,6 v4.65,6
RESET1  (via drill 0.3)
  Top 0.15: v4.65,6.75 5.55,6.75 R1-ESP2.1 | v7.8,6.75 8.85,7.8 10.8,7.8 C11.1 | 27.75,45.15 30.15,45.15 RESET_BUTTON1.3 | 27.75,45.15 26.25,45.15 RESET_BUTTON1.4 | v27.75,27.45 27.6,27.45 25.8,25.65 25.8,24.75 IC4.2 25.65,24.6 25.65,24 25.05,23.4 v22.2,23.4 | 27.75,45.15 v27.75,44.55 | v15.75,35.1 v13.95,35.1
  Bottom 0.15: v4.65,6.75 v7.8,6.75 13.65,6.75 14.7,7.8 22.5,7.8 27,3.3 27,2.55 27.45,2.1 27.75,2.1 28.2,2.55 28.2,27 v27.75,27.45 v27.75,44.55 | v13.95,35.1 13.95,33.15 12.6,31.8 10.35,31.8 SL2.4 | v15.75,35.1 15.75,29.85 v22.2,23.4
RX1  (via drill 0.3)
  Top 0.15: v16.65,9.9 16.65,7.35 IC4.11
  Bottom 0.15: v16.65,9.9 16.65,11.1 11.55,16.2 7.8,16.2 7.65,16.05 7.35,16.05 6.9,16.5 6.9,19.95 11.7,24.75 11.7,26.25 12,26.55 12,28.5 14.55,31.05 14.55,35.25 12.9,36.9 10.35,36.9 SL2.2
SCK1  (via drill 0.3)
  Top 0.15: v17.25,34.5 15.3,34.5 D10.2 | v24.9,41.25 25.8,42.15 R2.2 | v23.1,11.7 22.5,11.1 17.1,11.1 15.3,9.3 15.3,7.35 IC4.10 | 26.55,27.6 26.7,27.6 28.65,29.55 29.25,29.55 J4.P5 | 26.55,27.6 v25.2,28.95 | 26.55,27.6 v26.4,27.6
  Bottom 0.15: v17.25,34.5 18.15,34.5 18.9,35.25 | v24.9,41.25 18.9,35.25 | v23.1,11.7 23.1,21.9 26.4,25.2 v26.4,27.6 | v25.2,28.95 18.9,35.25
SCL1  (via drill 0.3)
  Top 0.15: v10.35,13.35 11.1,14.1 IC6.8 | v7.05,12.9 7.35,12.9 7.8,12.45 8.1,12.45 SENSOR1.4 | v3.45,4.5 3.9,4.05 4.35,4.05 R2_PINH1.1 | v13.5,43.05 14.4,43.95 LED3.4 | v20.4,25.95 20.4,25.65 21.3,24.75 IC4.5
  Bottom 0.15: 7.65,13.35 7.5,13.35 v7.05,12.9 | 7.65,13.35 v10.35,13.35 | v3.45,4.5 3.45,4.95 2.7,5.7 2.7,11.25 4.05,12.6 | 4.05,12.6 6,14.55 6.45,14.55 7.65,13.35 | v20.4,25.95 16.35,30 16.35,35.25 13.5,38.1 v13.5,43.05 13.2,43.35 12.15,43.35 1.35,32.55 1.35,15.3 4.05,12.6
SDA1  (via drill 0.3)
  Top 0.15: 9.3,13.95 8.7,13.35 8.25,13.35 SENSOR1.3 | 9.3,13.95 9.9,14.55 IC6.9 | v18.9,45 18.6,45.3 14.55,45.3 LED3.6 | v22.95,25.95 22.95,24.9 22.8,24.75 IC4.4 | v18.45,21.6 16.35,21.6 14.7,23.25 13.5,23.25 R1_PINH1.1 13.35,23.25 12.45,23.25 11.85,22.65 9.75,22.65 8.85,21.75 8.85,18 9,17.85 v9,15.6 | v9.15,14.1 9.3,13.95
  Bottom 0.15: v18.9,45 19.8,45 21,43.8 23.1,43.8 25.8,41.1 25.8,28.8 v22.95,25.95 22.95,22.65 19.95,19.65 19.65,19.65 18.45,20.85 v18.45,21.6 | v9.15,14.1 9.15,15.45 v9,15.6
SS1
  Top 0.15: 19.65,34.65 18.3,34.65 16.05,36.9 15.3,36.9 D11.2 | 19.65,34.65 22.05,37.05 22.05,42.15 R1.2 | 24.9,29.4 28.35,32.85 28.95,32.85 J4.P2 | 24.9,29.4 24.3,28.8 24.3,24.75 IC4.3 | 24.9,29.4 19.65,34.65
TX1  (via drill 0.3)
  Top 0.15: v17.7,10.5 17.7,8.55 18.15,8.1 18.15,7.35 IC4.12 | v15.9,13.5 15.9,18.75 v17.85,20.7 | v14.7,28.5 14.7,29.7 12.45,31.95 v12.45,32.4
  Bottom 0.15: v17.7,10.5 17.7,11.7 v15.9,13.5 | v17.85,20.7 17.85,25.35 v14.7,28.5 | v12.45,32.4 10.35,34.5 SL2.3
VBAT1  (via drill 0.3)
  Top 0.15: 1.35,38.25 2.1,39 2.1,39.45 2.4,39.75 U2.3 | 1.35,38.25 0.9,37.8 S12347DS-T1-GE1.3 | v12.3,39.6 12.3,41.25 | v27,4.95 26.4,4.35 25.95,4.35 SJ3.2 | v13.05,28.8 12.75,28.8 10.65,30.9 8.1,30.9 7.35,31.65 JP2.1 | v2.1,37.5 1.35,38.25 | 12.3,41.25 v10.8,42.75 | 12.3,41.25 C2_BAT1.1
  Bottom 0.15: v12.3,39.6 10.65,37.95 8.7,37.95 5.55,34.8 5.55,33.45 7.2,31.8 JP2.1 | v27,4.95 27,7.05 22.35,11.7 22.35,15.45 16.95,20.85 16.95,24.9 v13.05,28.8 | v2.1,37.5 2.4,37.5 2.85,37.05 5.1,37.05 v10.8,42.75
VBUS1  (via drill 0.3)
  Top 0.15: v3.9,44.25 3.9,45.15 CHG_LED1.A | v3.15,43.5 3.15,43.2 2.55,42.6 U2.4 | v4.05,42 5.25,40.8 C1_BAT3.1 | PFMF.050.2.2 2.25,35.4 2.85,36 2.85,36.6 S12347DS-T1-GE1.1 3,36.75 3.15,36.9 v3.15,37.65 | 2.55,3 2.55,2.1 3,1.65 C5_USB1.1 | 2.55,3 2.55,4.2 R1_PWRUSB1.2 | v28.65,1.65 D7.2 | v9.75,1.8 9.75,2.1 9.15,2.7 C4_USB1.1 9,2.85 8.85,3 2.55,3 | v2.4,12.75 3.15,13.5 3.45,13.5 D12.5
  Bottom 0.15: v3.9,44.25 v3.15,43.5 4.05,42.6 v4.05,42 4.05,38.55 v3.15,37.65 2.7,37.65 2.25,38.1 1.95,38.1 1.05,37.2 1.05,14.1 v2.4,12.75 2.4,4.8 5.4,1.8 v9.75,1.8 10.95,0.6 18.6,0.6 19.65,1.65 v28.65,1.65
VUSB1
  Top 0.15: J1.A9 6.6,20.4 6.6,20.55 J1.B4 6.6,20.7 7.2,20.7 7.65,21.15 7.65,24.6 7.2,25.05 6.6,25.05 J1.B9 | J1.B9 6.6,25.2 6.6,25.35 J1.A4 | J1.B9 6.45,25.05 2.4,25.05 0.75,26.7 0.75,29.4 2.1,30.75 PFMF.050.2.1